# EAGLE board FULLMONI-WIDE_LED-Board1_PCB (EAGLE 9.7.0)
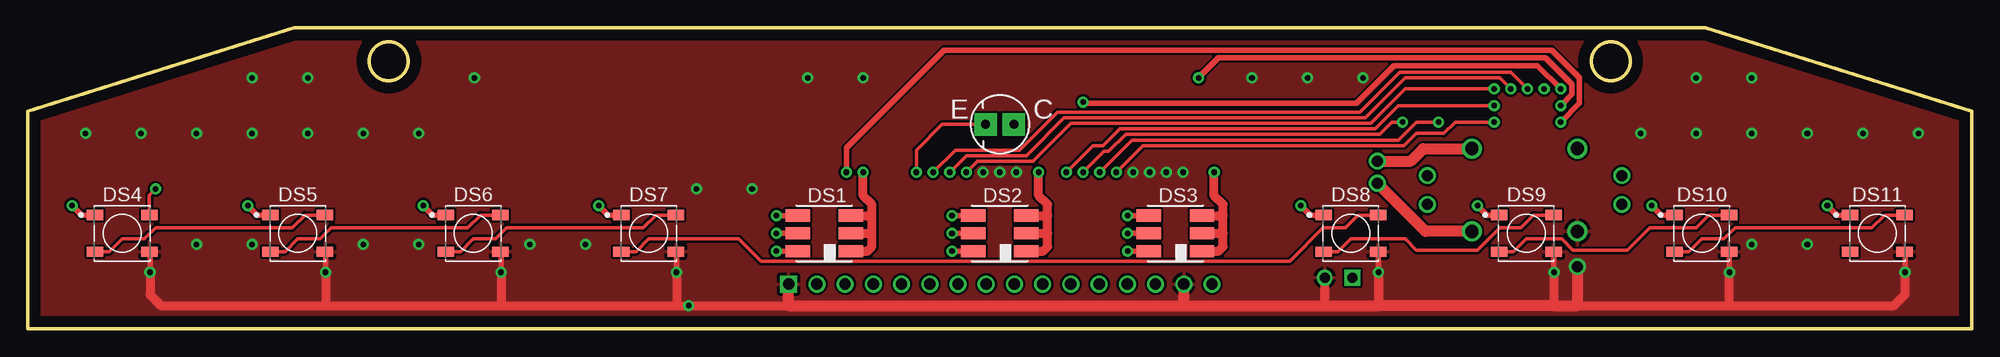
[diagram p0: board, top side]
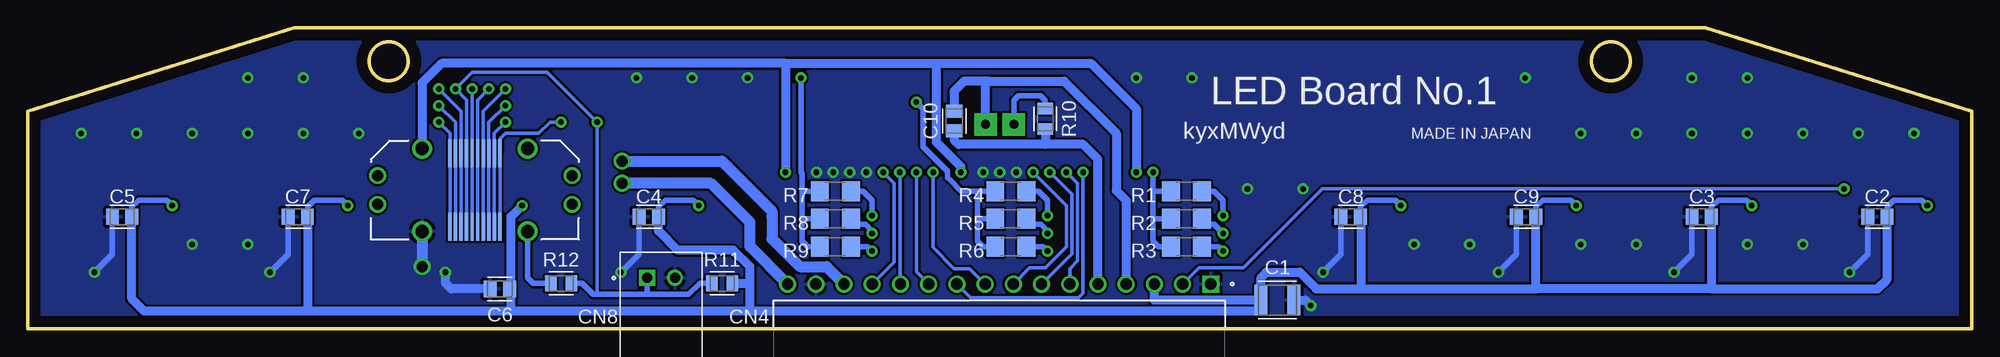
[diagram p1: board, bottom side, seen from below]

Size 175 x 27.1 mm. Coordinates in mm from the lower left corner, seen from the top.
Outline: 0,0 175,0 175,19.6 151,27.1 24,27.1 0,19.6 0,0
Outline: circle at 32.5,24.1 radius 1.75
Outline: circle at 142.5,24.1 radius 1.75
Copper layers (1*16): Top 0.035mm / dielectric 1.5mm / Bottom 0.035mm
Design rules "Fusion Electronics Design Rules *": minimum track width 0.2mm, minimum drill 0.5mm, track to track 0.2mm, track to pad 0.2mm, pad to pad 0.2mm, via to via 0.2mm, smd to smd 0.2mm, copper to edge 1mm, drill to drill 0.2mm, minimum pad ring 10mil, minimum via ring 0.1mm, stop-mask expansion 0.1mm, vias tented up to drill 0.51mm, thermal gap 0.3mm

## Footprints (pad centres in the part's own frame; a part is rotated, then mirrored left to right if it is on the bottom)
CAPC3225X135 = smd 1.165 x 2.715: 1 -1.475,0; 2 1.475,0
CAPC2012X110 = smd 1.165 x 1.465: 1 -0.875,0; 2 0.875,0
FX23-20P-0.5SV20 = drill 1 pad 1.4: M1 -8.75,-1.3; M2 8.75,-1.3; M3 -8.75,1.3; M4 8.75,1.3 | drill 1.2 pad 1.6: P1 -4.75,-3.725; P2 4.75,-3.725; P3 -4.75,3.725; P4 4.75,3.725 | smd 0.3 x 2.5: S1 -2.25,-3.3; S2 -1.75,-3.3; S3 -1.25,-3.3; S4 -0.75,-3.3; S5 -0.25,-3.3; S6 0.25,-3.3; S7 0.75,-3.3; S8 1.25,-3.3; S9 1.75,-3.3; S10 2.25,-3.3; S11 -2.25,3.3; S12 -1.75,3.3; S13 -1.25,3.3; S14 -0.75,3.3; S15 -0.25,3.3; S16 0.25,3.3; S17 0.75,3.3; S18 1.25,3.3; S19 1.75,3.3; S20 2.25,3.3
SAMTEC_TSW-116-08-G-S-NA = drill 1.02 pad 1.37 square: 01 0,0 | drill 1.02 pad 1.37: 02 -2.54,0; 03 -5.08,0; 04 -7.62,0; 05 -10.16,0; 06 -12.7,0; 07 -15.24,0; 08 -17.78,0; 09 -20.32,0; 10 -22.86,0; 11 -25.4,0; 12 -27.94,0; 13 -30.48,0; 14 -33.02,0; 15 -35.56,0; 16 -38.1,0
HDR-02/RA = drill 0.9 square: 1 -1.25,0 | drill 0.9: 2 1.25,0
KAAF-5050RGBS-13 = smd 2.2 x 1.1: 1 2.4,-1.6; 2 2.4,0; 3 2.4,1.6; 4 -2.4,1.6; 5 -2.4,0; 6 -2.4,-1.6
WS2812B = smd 1.5 x 0.9: 1 -2.45,1.65; 2 -2.45,-1.65; 3 2.45,-1.65; 4 2.45,1.65
NJL7302L-F5 = drill 0.8 pad 2 square: P$1 -1.27,0; P$2 1.27,0
R3216 = smd 1.6 x 1.8: 1 -1.4,0; 2 1.4,0
RESC2012X65 = smd 1.031 x 1.42: 1 -0.919,0; 2 0.919,0

## Placement (x,y rotation side)
C1  SC2021-105  [CAPC3225X135]  62.5,2.6 0 bottom
C2  SC2021-104  [CAPC2012X110]  8.5,10.1 180 bottom
C3  SC2021-104  [CAPC2012X110]  24.3,10.1 180 bottom
C4  SC2021-104  [CAPC2012X110]  119.1,10.1 180 bottom
C5  SC2021-104  [CAPC2012X110]  166.5,10.1 180 bottom
C6  SC2021-104  [CAPC2012X110]  132.5,3.6 180 bottom
C7  SC2021-104  [CAPC2012X110]  150.7,10.1 180 bottom
C8  SC2021-104  [CAPC2012X110]  55.9,10.1 180 bottom
C9  SC2021-104  [CAPC2012X110]  40.1,10.1 180 bottom
C10  104  [CAPC2012X110]  91.6,18.7 270 bottom
CN1  FX23-20P-0.5SV20  [FX23-20P-0.5SV20]  134.75,12.5 180 bottom
CN4  TSW-116-08-G-S-NA  [SAMTEC_TSW-116-08-G-S-NA]  68.5,4.04 0 bottom
CN8  S2B-XH-A(LF)(SN)  [HDR-02/RA]  118,4.6 0 bottom
DS1  KAAF-5050RGBS-13  [KAAF-5050RGBS-13]  71.7,8.6 0 top
DS2  KAAF-5050RGBS-13  [KAAF-5050RGBS-13]  87.5,8.6 0 top
DS3  KAAF-5050RGBS-13  [KAAF-5050RGBS-13]  103.3,8.6 0 top
DS4  WS2812B  [WS2812B]  8.5,8.6 0 top
DS5  WS2812B  [WS2812B]  24.3,8.6 0 top
DS6  WS2812B  [WS2812B]  40.1,8.6 0 top
DS7  WS2812B  [WS2812B]  55.9,8.6 0 top
DS8  WS2812B  [WS2812B]  119.1,8.6 0 top
DS9  WS2812B  [WS2812B]  134.9,8.6 0 top
DS10  WS2812B  [WS2812B]  150.7,8.6 0 top
DS11  WS2812B  [WS2812B]  166.5,8.6 0 top
Q1  NJL7302L-F5  [NJL7302L-F5]  87.5,18.4 0 top
R1  SR3216-N.C  [R3216]  70.7,12.4 0 bottom
R2  SR3216-222  [R3216]  70.7,9.9 0 bottom
R3  SR3216-N.C  [R3216]  70.7,7.4 0 bottom
R4  SR3216-222  [R3216]  86.5,12.4 0 bottom
R5  SR3216-N.C  [R3216]  86.5,9.9 0 bottom
R6  SR3216-N.C  [R3216]  86.5,7.4 0 bottom
R7  SR3216-N.C  [R3216]  102.3,12.4 0 bottom
R8  SR3216-222  [R3216]  102.3,9.9 0 bottom
R9  SR3216-N.C  [R3216]  102.3,7.4 0 bottom
R10  SR2012-122  [RESC2012X65]  83.4,18.9 90 bottom
R11  SR2012-102  [RESC2012X65]  112.5,4.1 0 bottom
R12  SR2012-N.C  [RESC2012X65]  127,4.1 180 bottom

## Library data of the parts
C1-C10 = Capacitor; CATEGORY: Capacitor
CN1 DS1-DS3 Q1 = ECADライブラリ
CN4 = ECADライブラリ; MANUFACTURER: Samtec; PARTREV: R; STANDARD: Manufacturer Recommendations
CN8 = Connectors; CREATED_BY: PCBLayout.com; DIGIKEY_PART_NUMBER: 455-2257-ND; MANUFACTURER: JST Sales America Inc.; MPN: S2B-XH-A(LF)(SN)
DS4-DS11 = ECADライブラリ; CATEGORY: LED; COLOR: RGB; DESCRIPTION: LED integrated light source; MANUFACTURER: Worldsemi; MPN: WS2812B; OPERATING_TEMP: -25 ℃ to +80℃(TJ); PART_STATUS: Active; SUB_CATEGORY: RGB
R1-R9 = rcl; SPICEPREFIX: R
R10-R12 = Resistor; CATEGORY: Resistor; SUB-CATEGORY: Fixed

## Nets
+5VD: C1.1 C2.1 C3.1 C4.1 C5.1 C6.1 C7.1 C8.1 C9.1 CN4.03 DS4.1 DS5.1 DS6.1 DS7.1 DS8.1 DS9.1 DS10.1 DS11.1 R11.2
+5VREF: C10.1 CN4.04 Q1.P$2
AGND: C10.2 CN4.05 R10.1
BEAM: CN1.S8 CN1.S18 R4.1 R5.1 R6.1
BELTS: CN1.S3 CN1.S13 CN4.09
BREAK: CN1.S5 CN1.S15 CN4.07
CHARGE: CN1.S6 CN1.S16 CN4.06
CHECK_HEAT: CN1.S4 CN1.S14 CN4.08
DGND: C1.2 C2.2 C3.2 C4.2 C5.2 C6.2 C7.2 C8.2 C9.2 CN1.P4 CN4.01 CN4.15 CN8.2 DS4.3 DS5.3 DS6.3 DS7.3 DS8.3 DS9.3 DS10.3 DS11.3
FUEL.M: CN1.P1 CN4.14
GND2: CN1.P2 DS1.1 DS1.2 DS1.3 DS2.1 DS2.2 DS2.3 DS3.1 DS3.2 DS3.3
IG1: CN1.P3 CN4.16 R12.2
ILLUMINANCE: CN4.10 Q1.P$1 R10.2
N$1: DS1.4 R1.2
N$2: DS3.4 R7.2
N$3: DS2.4 R4.2
N$4: DS1.5 R2.2
N$5: DS1.6 R3.2
N$6: DS3.5 R8.2
N$7: DS3.6 R9.2
N$9: DS2.5 R5.2
N$10: DS2.6 R6.2
N$11: DS4.2 DS5.4
N$12: DS5.2 DS6.4
N$13: DS6.2 DS7.4
N$14: DS7.2 DS8.4
N$15: DS8.2 DS9.4
N$16: DS9.2 DS10.4
N$17: DS10.2 DS11.4
NEODATA: CN4.02 DS4.4
RSV1: CN1.S1 CN1.S11 CN4.12
RSV2: CN1.S2 CN1.S12 CN4.13
RSW: CN1.S7 CN1.S17 CN4.11 CN8.1 R11.1 R12.1
TURN-L: CN1.S10 CN1.S20 R1.1 R2.1 R3.1
TURN-R: CN1.S9 CN1.S19 R7.1 R8.1 R9.1

## Tracks (layer width: path | path; a pad name or v marks a point on that pad's centre or on a via)
+5VD  (via drill 0.5 pad 1)
  Top 0.5: DS4.1 4.85,10.25 v4,11.1 | DS5.1 20.65,10.25 v19.8,11.1 | DS6.1 36.45,10.25 v35.6,11.1 | DS7.1 52.25,10.25 v51.4,11.1 | DS8.1 115.45,10.25 v114.6,11.1 | DS10.1 147.05,10.25 v146.2,11.1 | DS11.1 162.85,10.25 v162,11.1 | v130.5,11.1 131.35,10.25 DS9.1
  Bottom 0.5: v4,11.1 4.5,11.6 7,11.6 7.62,10.97 C2.1 | v19.8,11.1 20.3,11.6 22.8,11.6 23.43,10.97 C3.1 | v35.6,11.1 36.1,11.6 38.6,11.6 39.23,10.97 C9.1 | v51.4,11.1 51.9,11.6 54.4,11.6 55.02,10.97 C8.1 | v114.6,11.1 115.1,11.6 117.6,11.6 118.22,10.97 C4.1 | v146.2,11.1 146.7,11.6 149.2,11.6 149.82,10.97 C7.1 | v162,11.1 162.5,11.6 165,11.6 165.62,10.97 C5.1 | C6.1 131.5,3.6
  Bottom 0.8: CN4.03 73.58,2.6 C1.1 | C1.1 63.98,1.6 110,1.6 | C1.1 63.98,4.62 63.5,5.1 60.5,5.1 59,3.6 55,3.6 | 55,3.6 55,10.07 C8.1 | 55,3.6 39.23,3.6 | 39.23,3.6 C9.1 | 23.43,3.6 39.23,3.6 | C3.1 23.43,3.6 | 23.43,3.6 8.5,3.6 7.62,4.47 C2.1 | 110,1.6 110,4.1 | 110,4.1 110,5.6 111.5,7.1 116.5,7.1 118.22,8.82 C4.1 | R11.2 110,4.1 | 110,1.6 131.5,1.6 | 131.5,1.6 149.82,1.6 | C7.1 149.82,1.6 | 131.5,1.6 131.5,3.6 131.5,10.1 v130.5,11.1 | 149.82,1.6 164.5,1.6 165.62,2.73 C5.1
+5VREF
  Bottom 0.8: Q1.P$2 88.77,22.03 88.5,22.3 | 88.5,22.3 81.7,22.3 77,17.6 77,12.44 76.12,11.56 CN4.04 | 88.5,22.3 90.7,22.3 91.6,21.4 C10.1
AGND
  Bottom 0.8: CN4.05 78.66,15.26 80,16.6 83.4,16.6 | 83.4,16.6 91.2,16.6 91.6,17 C10.2 | R10.1 83.4,16.6
BEAM  (via drill 0.5 pad 1)
  Top 0.5: v138,21.6 135.9,23.7 123,23.7 119.6,20.3 98.4,20.3 96.9,20.3 95.1,20.3 v95,20.4
  Bottom 0.3: v138,21.6 136,19.6 CN1.S8 CN1.S18
  Bottom 0.5: R6.1 89,7.4 89.5,7.9 89.5,9.9 | 89.5,9.9 89.5,12.4 | R5.1 89.5,9.9 | R4.1 89.5,12.4 | 89.5,12.4 91,12.4 92,13.4 92.2,13.6 92.2,14.2 94.4,16.4 94.4,19.8 v95,20.4
BELTS  (via drill 0.5 pad 1)
  Top 0.3: v93.5,14.1 95.9,16.5 96.8,16.5 98.3,18 121.3,18 123.4,20.1 v132,20.1
  Bottom 0.3: CN4.09 90.22,5.44 91.6,5.44 93.5,7.33 v93.5,14.1 | v132,20.1 133.5,18.6 CN1.S3 CN1.S13
BREAK  (via drill 0.5 pad 1)
  Top 0.3: v83,14.1 84.5,15.6 89.9,15.6 93.3,19 120.4,19 124,22.6 132.5,22.6 v133.5,21.6
  Bottom 0.3: CN4.07 81,6.78 81,12.1 v83,14.1 | v133.5,21.6 134.5,20.6 CN1.S5 CN1.S15
CHARGE  (via drill 0.5 pad 1)
  Top 0.3: v81.5,14.1 83.5,16.1 89.3,16.1 92.7,19.5 119.9,19.5 123.5,23.1 133.5,23.1 v135,21.6
  Bottom 0.3: CN4.06 81.2,5.44 80.5,6.13 80.5,13.1 v81.5,14.1 | v135,21.6 CN1.S6 CN1.S16
CHECK_HEAT  (via drill 0.5 pad 1)
  Top 0.3: v84.5,14.1 85.5,15.1 90.5,15.1 93.9,18.5 120.9,18.5 124,21.6 v132,21.6
  Bottom 0.3: CN4.08 84.81,5.5 83.4,5.5 81.5,7.4 81.5,11.1 v84.5,14.1 | v132,21.6 134,19.6 CN1.S4 CN1.S14
DGND  (via drill 0.5 pad 1, 1 pad 1.5)
  Top 0.3: DS4.3 11,6.9
  Top 0.5: 11,6.9 v11,5.1 | v26.8,5.1 26.8,6.9 DS5.3 | v42.6,5.1 42.6,6.9 DS6.3 | v58.4,5.1 58.4,6.9 DS7.3 | v121.6,5.1 121.6,6.9 DS8.3 | v137.4,5.1 137.4,6.9 DS9.3 | v153.2,5.1 153.2,6.9 DS10.3 | v169,5.1 169,6.9 DS11.3
  Top 0.8: 26.8,2.1 12,2.1 11,3.1 v11,5.1 | 26.8,2.1 42.6,2.1 | v26.8,5.1 26.8,2.1 | 42.6,2.1 58.4,2.1 | v42.6,5.1 42.6,2.1 | 58.4,2.1 v59.5,2.1 68.5,2.1 | v58.4,5.1 58.4,2.1 | v121.6,5.1 121.6,2.1 | v137.4,5.1 137.4,2.1 | 153.2,2.1 139.5,2.1 139.5,2.5 | 153.2,2.1 v153.2,5.1 | 153.2,2.1 168,2.1 169,3.1 v169,5.1 | CN8.2 116.75,2.15 116.7,2.1
  Top 1: CN4.01 68.5,2.1 104.06,2.1 | 104.06,2.1 CN4.15 | 104.06,2.1 116.7,2.1 121.6,2.1 137.4,2.1 139.5,2.1 | v139.5,5.6 139.5,2.5
  Bottom 0.5: v11,5.1 9.38,6.72 C2.2 | v26.8,5.1 25.18,6.72 C3.2 | v42.6,5.1 40.98,6.72 C9.2 | v58.4,5.1 56.77,6.72 C8.2 | v121.6,5.1 119.97,6.72 C4.2 | v153.2,5.1 151.57,6.72 C7.2 | v169,5.1 167.38,6.72 C5.2
  Bottom 0.8: C1.2 60,2.6 v59.5,2.1 | C6.2 136.88,3.6 137.4,4.12 v137.4,5.1
  Bottom 1: CN1.P4 v139.5,5.6
  other vias: 99.5,14.1 101,14.1 102.5,14.1 104,14.1 40.2,22.6 35.2,17.6 25.2,22.6 30.2,17.6 25.2,17.6 20.2,22.6 20.2,17.6 15.2,17.6 10.2,17.6 5.2,17.6 70.2,22.6 75.2,22.6 15.2,7.6 20.2,7.6 30.2,7.6 35.2,7.6 45.2,7.6 50.2,7.6 60.2,12.6 65.2,12.6 110.2,22.6 115.2,22.6 120.2,22.6 145.2,17.6 150.2,17.6 155.2,22.6 160.2,17.6 150.2,22.6 155.2,17.6 165.2,17.6 170.2,17.6 155.2,7.6 160.2,7.6 86,14.1 87.5,14.1 89,14.1
  pour Bottom: 0.15,0.25 174.85,0.25 174.85,26.95 0.15,26.95
  pour Top: 0.15,0.25 174.85,0.25 174.85,26.95 0.15,26.95
FUEL.M  (via drill 1 pad 1.5)
  Top 1: v121.5,15.1 124.5,15.1 125.62,16.23 CN1.P1
  Bottom 1: v121.5,15.1 112.5,15.1 112,14.6 108,10.6 108,10.1 108,8.1 105.5,5.6 103.08,5.6 CN4.14
GND2  (via drill 0.5 pad 1)
  Top 0.8: DS2.1 91.4,7 91.8,7.4 91.8,8.6 | 91.8,8.6 91.8,10.2 | 91.8,10.2 91.8,11.2 91,12 v91,14.1 | DS2.2 91.8,8.6 | DS2.3 91.8,10.2 | DS1.1 75.6,7 76,7.4 76,8.6 | 76,8.6 76,10.2 | 76,10.2 76,11.2 75.2,12 v75.2,14.1 | DS1.2 76,8.6 | DS1.3 76,10.2 | DS3.1 107.2,7 107.6,7.4 107.6,8.6 | 107.6,8.6 107.6,10.2 | 107.6,10.2 107.6,11.2 106.8,12 v106.8,14.1 | DS3.2 107.6,8.6 | DS3.3 107.6,10.2
  Bottom 0.8: v75.2,14.1 75.2,19.8 79.3,23.9 93.2,23.9 | 93.2,23.9 95,23.9 106.8,23.9 | 106.8,23.9 137.73,23.9 139.5,22.13 CN1.P2 | v91,14.1 91,14.6 93.2,16.8 93.2,23.9 | 106.8,23.9 v106.8,14.1
IG1  (via drill 1 pad 1.5)
  Top 1: v121.5,13.1 125.83,8.78 CN1.P3
  Bottom 0.5: CN1.P3 130,4.6 129.5,4.1 R12.2
  Bottom 1: CN4.16 110,7.44 110,9.6 113.5,13.1 v121.5,13.1
ILLUMINANCE  (via drill 0.5 pad 1)
  Top 0.3: v80,14.1 80,16.1 82.3,18.4 Q1.P$1
  Bottom 0.3: CN4.10 90.12,2.8 80.4,2.8 80,3.2 80,13.3 v80,14.1
  Bottom 0.5: R10.2 83.42,20.6 83.82,21 85.83,21 86.23,20.6 Q1.P$1
N$1  (via drill 0.5 pad 1)
  Top 0.5: DS1.4 v67.4,10.2
  Bottom 0.5: v67.4,10.2 67.4,11.6 68.2,12.4 R1.2
N$2  (via drill 0.5 pad 1)
  Top 0.5: DS3.4 v99,10.2
  Bottom 0.5: v99,10.2 99,11.6 99.8,12.4 R7.2
N$3  (via drill 0.5 pad 1)
  Top 0.5: DS2.4 v83.2,10.2
  Bottom 0.5: v83.2,10.2 83.2,11.6 84,12.4 R4.2
N$4  (via drill 0.5 pad 1)
  Top 0.5: DS1.5 v67.4,8.6
  Bottom 0.5: v67.4,8.6 68.2,9.4 68.6,9.4 68.8,9.4 R2.2
N$5  (via drill 0.5 pad 1)
  Top 0.5: DS1.6 v67.4,7
  Bottom 0.5: R3.2 67.8,7.4 v67.4,7
N$6  (via drill 0.5 pad 1)
  Top 0.5: DS3.5 v99,8.6
  Bottom 0.5: v99,8.6 99,8.8 99.6,9.4 100.2,9.4 100.4,9.4 R8.2
N$7  (via drill 0.5 pad 1)
  Top 0.5: DS3.6 v99,7
  Bottom 0.5: v99,7 99.4,7.4 R9.2
N$9  (via drill 0.5 pad 1)
  Top 0.5: DS2.5 v83.2,8.6
  Bottom 0.5: v83.2,8.6 83.2,8.8 83.8,9.4 84.6,9.4 R5.2
N$10  (via drill 0.5 pad 1)
  Top 0.5: DS2.6 v83.2,7
  Bottom 0.5: v83.2,7 83.6,7.4 R6.2
N$11
  Top 0.3: DS4.2 7.35,6.95 8.5,8.1 10.5,8.1 11.5,9.1 23.8,9.1 24.95,10.25 DS5.4
N$12
  Top 0.3: DS5.2 23.15,6.95 24.3,8.1 26.3,8.1 27.3,9.1 39.6,9.1 40.75,10.25 DS6.4
N$13
  Top 0.3: DS6.2 38.95,6.95 40.1,8.1 42.1,8.1 43.1,9.1 55.4,9.1 56.55,10.25 DS7.4
N$14
  Top 0.3: DS7.2 54.75,6.95 55.9,8.1 64,8.1 66,6.1 113.6,6.1 116.6,9.1 118.6,9.1 119.75,10.25 DS8.4
N$15
  Top 0.3: DS8.2 117.95,6.95 119.1,8.1 124,8.1 125,7.1 130.5,7.1 132.5,9.1 134.4,9.1 135.55,10.25 DS9.4
N$16
  Top 0.3: DS9.2 133.75,6.95 134.9,8.1 138.1,8.1 139.1,7.1 144,7.1 146,9.1 150.2,9.1 151.35,10.25 DS10.4
N$17
  Top 0.3: DS10.2 149.55,6.95 150.7,8.1 152.7,8.1 153.7,9.1 166,9.1 167.15,10.25 DS11.4
NEODATA  (via drill 0.5 pad 1)
  Top 0.3: v11.5,12.6 10.95,12.05 DS4.4
  Bottom 0.3: v11.5,12.6 58.48,12.6 65.58,5.5 69.58,5.5 CN4.02
RSV1  (via drill 0.5 pad 1)
  Top 0.3: v96.5,14.1 99.4,17 123.4,17 125,18.6 v127,18.6
  Bottom 0.3: v96.5,14.1 96.5,4.1 CN4.12 | v127,18.6 128,18.6 129,17.6 132,17.6 132.5,17.1 CN1.S1 CN1.S11
RSV2  (via drill 0.5 pad 1)
  Top 0.3: v98,14.1 100.4,16.5 123.9,16.5 125,17.6 127.5,17.6 128.5,18.6 v132,18.6
  Bottom 0.3: CN4.13 97,6.01 97,13.1 v98,14.1 | CN1.S12 CN1.S2 133,17.6 v132,18.6
RSW  (via drill 0.5 pad 1)
  Top 0.3: v95,14.1 96.9,16 97.31,16 98.86,17.5 121.7,17.5 122.8,18.6 v123.75,18.6
  Bottom 0.3: v95,14.1 95,5.13 CN4.11 | CN1.S17 CN1.S7 135.5,20.6 v136.5,21.6 135,23.1 128.25,23.1 v123.75,18.6 123.75,3.15 123.8,3.1
  Bottom 0.5: R11.1 114.5,4.1 115.5,3.1 119.3,3.1 | R12.1 125.1,4.1 124.1,3.1 123.8,3.1 119.3,3.1 | CN8.1 119.25,3.15 119.3,3.1
TURN-L  (via drill 0.5 pad 1)
  Top 0.5: v73.7,14.1 73.7,16.3 82.5,25.1 137.2,25.1 139.7,22.6 139.7,20.3 v138,18.6
  Bottom 0.3: v138,18.6 137,17.6 CN1.S10 CN1.S20
  Bottom 0.5: R3.1 73.2,7.4 73.6,7.8 73.7,7.9 73.7,9.9 | 73.7,9.9 73.7,12.4 | 73.7,12.4 v73.7,14.1 | R2.1 73.7,9.9 | R1.1 73.7,12.4
TURN-R  (via drill 0.5 pad 1)
  Top 0.5: v138,20.1 139,21.1 139,22 136.6,24.4 107.2,24.4 v105.4,22.6
  Bottom 0.3: v138,20.1 136.5,18.6 CN1.S9 CN1.S19
  Bottom 0.5: R9.1 104.8,7.4 105.3,7.9 105.3,9.9 | 105.3,12.4 105.3,14 105.4,14.1 v105.4,22.6 | 105.3,12.4 105.3,9.9 | R8.1 105.3,9.9 | R7.1 105.3,12.4

## Text on the board
bPlace: LED Board No.1 | MADE IN JAPAN | kyxMWyd